# EAGLE board Version 3.0 (EAGLE 7.2.0)
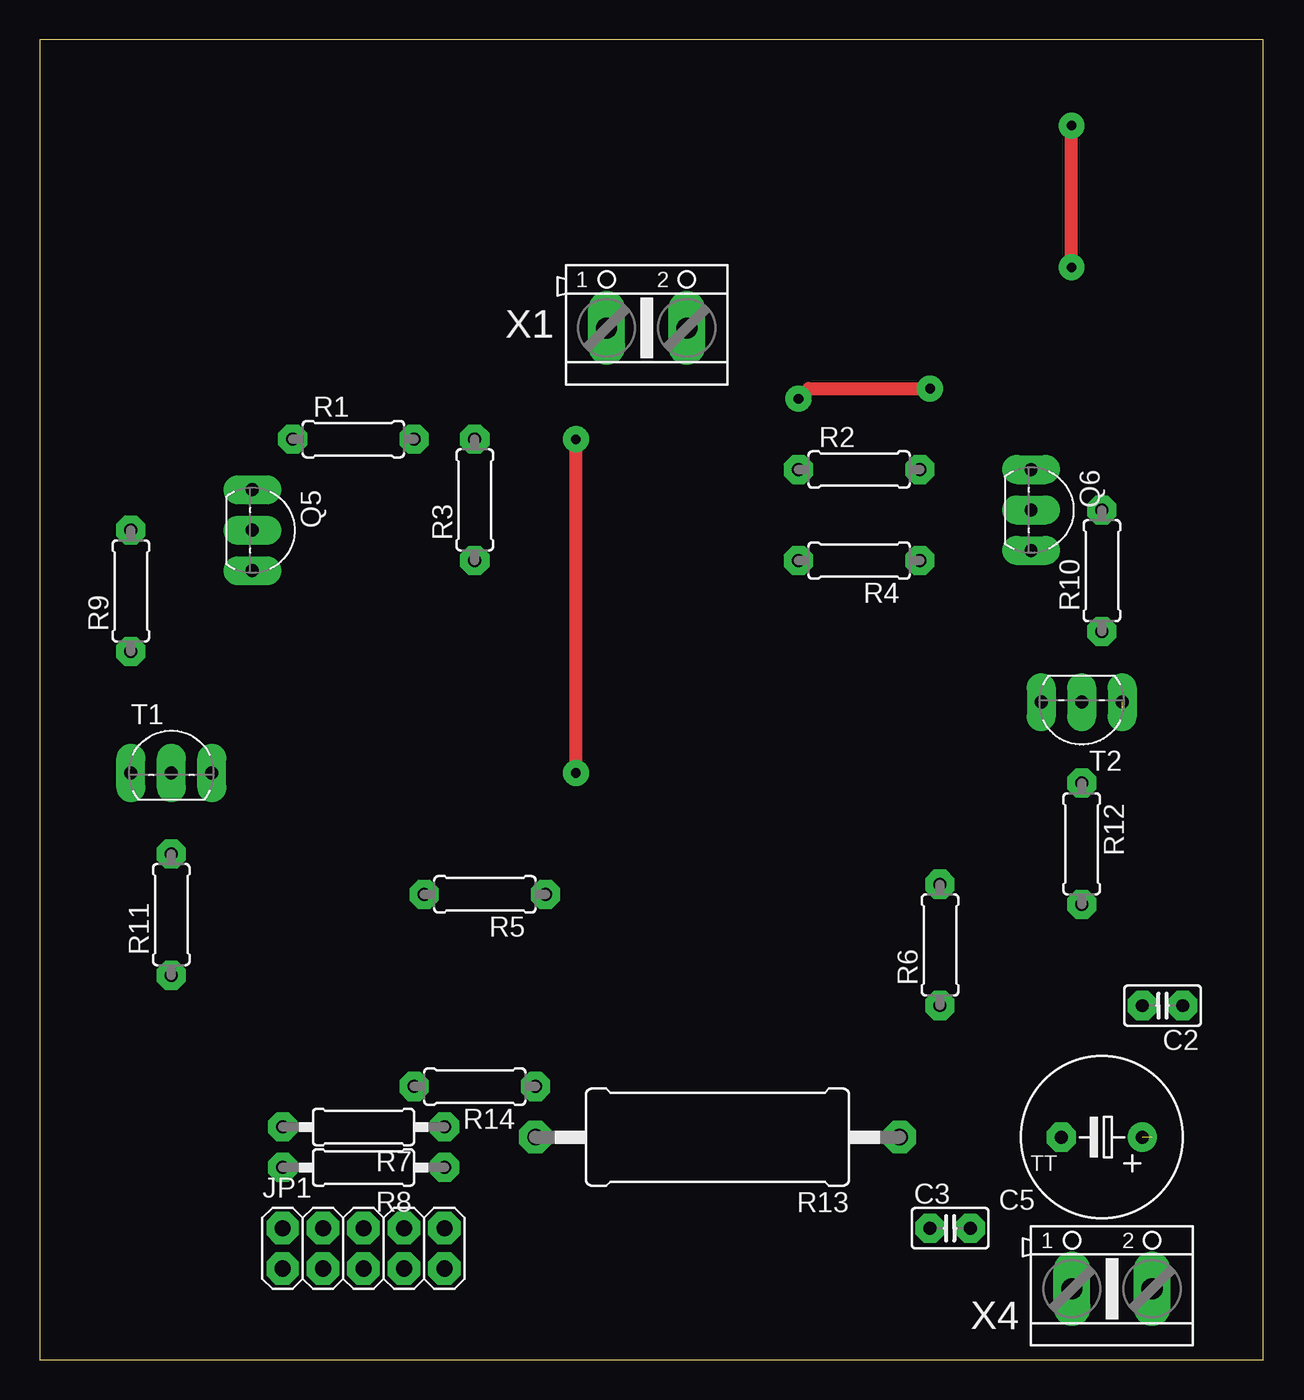
[diagram p0: board, top side]
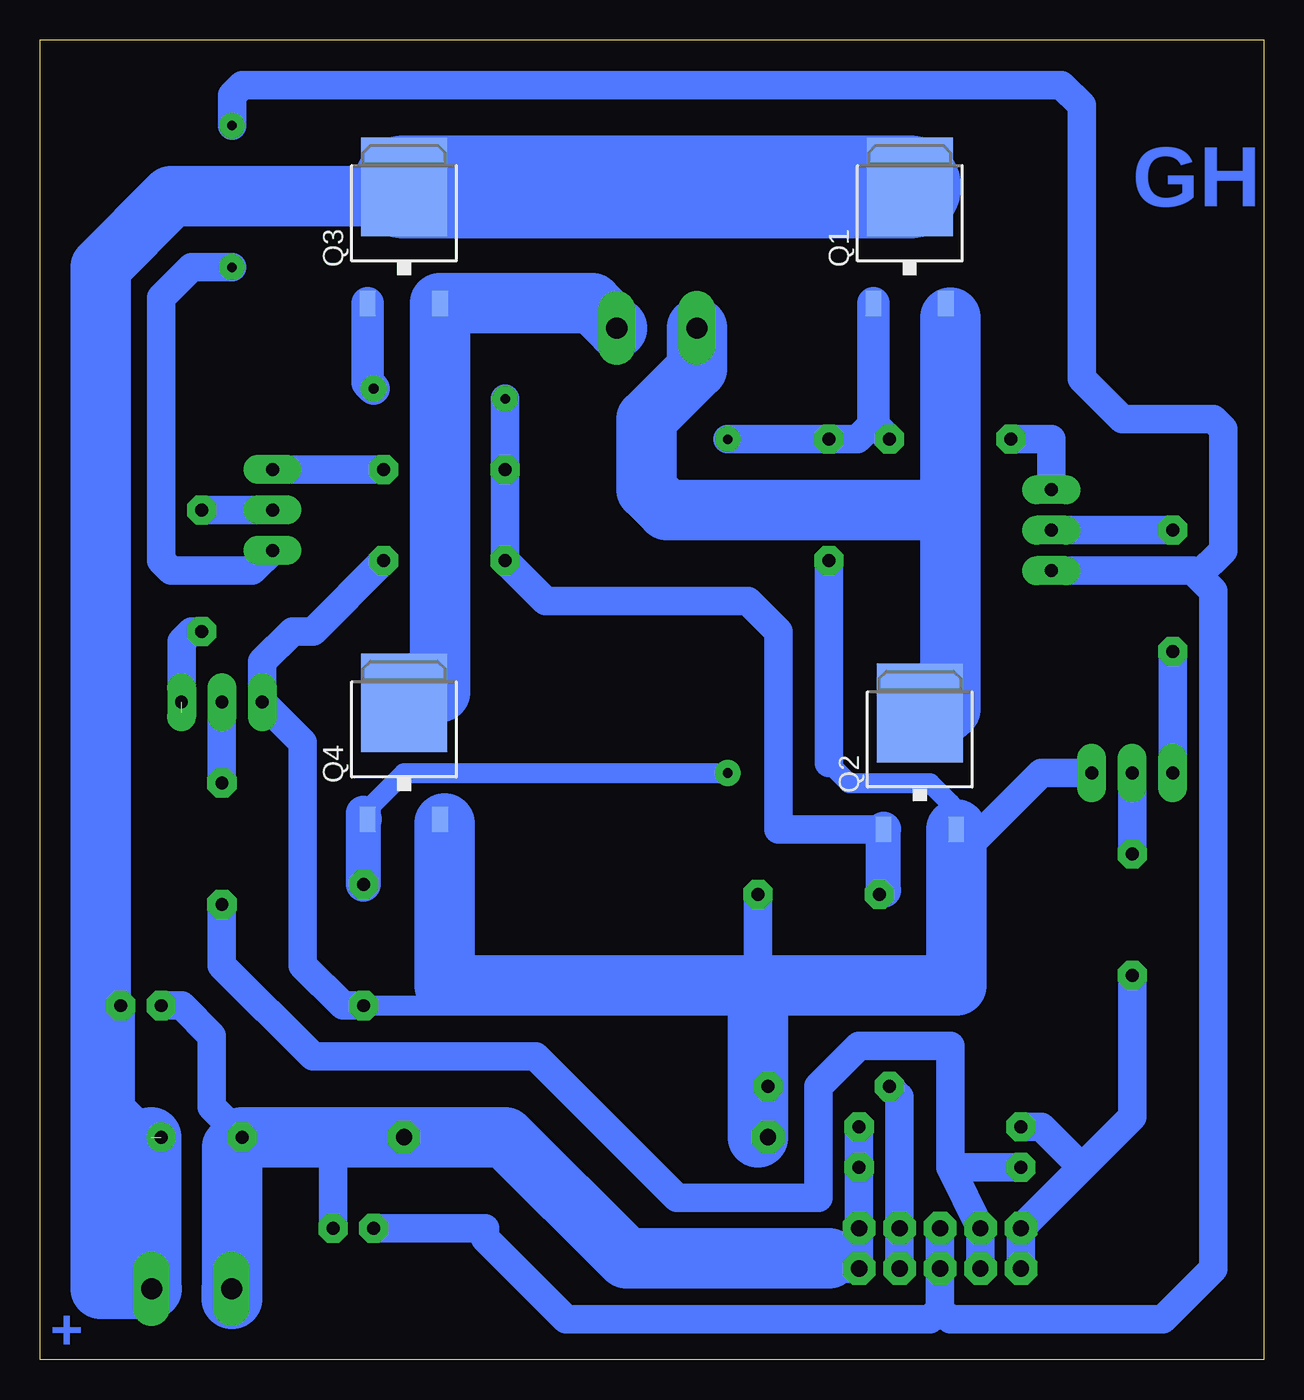
[diagram p1: board, bottom side, seen from below]

Size 76.81 x 82.86 mm. Coordinates in mm from the lower left corner, seen from the top.
Outline: 0,0 76.81,0 76.81,82.86 0,82.86 0,0
Copper layers (1*16): Top 0.035mm / dielectric 1.5mm / Bottom 0.035mm
Design rules "default": minimum track width 40mil, minimum drill 40mil, track to track 8mil, track to pad 8mil, pad to pad 8mil, via to via 8mil, smd to smd 8mil, copper to edge 40mil, drill to drill 8mil, minimum pad ring 20mil, minimum via ring 20mil, stop-mask expansion 4mil, vias tented up to drill 0mil, thermal gap 40mil

## Footprints (pad centres in the part's own frame; a part is rotated, then mirrored left to right if it is on the bottom)
C025-025X050 = drill 0.813 octagon: 1 -1.27,0; 2 1.27,0
TT5D10 = drill 0.813: + -2.54,0 | drill 0.813 octagon: - 2.54,0
2X05 = drill 1.016 octagon: 1 -5.08,-1.27; 2 -5.08,1.27; 3 -2.54,-1.27; 4 -2.54,1.27; 5 0,-1.27; 6 0,1.27; 7 2.54,-1.27; 8 2.54,1.27; 9 5.08,-1.27; 10 5.08,1.27
TO252 = smd 1 x 1.6: 1 -2.28,-4.8; 2 2.28,-4.8 | smd 5.4 x 6.2: 3 0,2.5
TO92-EBC = drill 0.813 long: B 0,-1.27; C -2.54,-1.27; E 2.54,-1.27
0207/7 = drill 0.813 octagon: 1 -3.81,0; 2 3.81,0
0207/10 = drill 0.813 octagon: 1 -5.08,0; 2 5.08,0
0617/22 = drill 1.016 octagon: 1 -11.43,0; 2 11.43,0
TO92-CBE = drill 0.813 long: B 0,0; C -2.54,0; E 2.54,0
AK500/2 = drill 1.321 long: 1 -2.515,0; 2 2.515,0

## Placement (x,y rotation side)
C2  100nf  [C025-025X050]  70.48,22.23 180 top
C3  100nf  [C025-025X050]  57.15,8.26 0 top
C5  1000 uf  [TT5D10]  66.67,13.97 180 top
JP1  [2X05]  20.32,6.99 0 top
Q1  PO903BDGTO252  [TO252]  22.23,71.12 0 bottom
Q2  PO903BDGTO252  [TO252]  21.59,38.1 0 bottom
Q3  PO903BDGTO252  [TO252]  53.98,71.12 0 bottom
Q4  PO903BDGTO252  [TO252]  53.98,38.73 0 bottom
Q5  BC557  [TO92-EBC]  14.61,52.07 270 top
Q6  BC557  [TO92-EBC]  63.5,53.34 270 top
R1  100R  [0207/7]  19.68,57.78 0 top
R2  100R  [0207/7]  51.44,55.88 0 top
R3  10k  [0207/7]  27.3,53.98 90 top
R4  10k  [0207/7]  51.44,50.16 180 top
R5  10k  [0207/7]  27.94,29.21 180 top
R6  10k  [0207/7]  56.52,26.04 90 top
R7  10k  [0207/10]  20.32,14.61 180 top
R8  10k  [0207/10]  20.32,12.06 180 top
R9  10k  [0207/7]  5.71,48.26 90 top
R10  10k  [0207/7]  66.67,49.53 90 top
R11  1k  [0207/7]  8.26,27.94 90 top
R12  1k  [0207/7]  65.41,32.38 270 top
R13  0.33  [0617/22]  42.55,13.97 180 top
R14  4K7  [0207/7]  27.3,17.14 180 top
T1  BC547  [TO92-CBE]  8.26,36.83 0 top
T2  BC547  [TO92-CBE]  65.41,41.27 180 top
X1  [AK500/2]  38.1,64.77 0 top
X4  [AK500/2]  67.31,4.45 0 top

## Library data of the parts
C2 C3 C5 R1-R14 = rcl
JP1 = pinhead
Q1-Q4 = transistor-fet
Q5 Q6 = transistor-pnp
T1 T2 = transistor
X1 X4 = con-ptr500; OC_FARNELL: unknown; OC_NEWARK: unknown

## Nets
+12V: C2.1 C5.+ Q1.3 Q3.3 X4.2
+18V: C3.1 JP1.5 JP1.6 Q5.E Q6.E
A: JP1.1 JP1.2 R7.2 R11.1
B: JP1.3 JP1.4 R8.2 R12.2
GND: C2.2 C3.2 C5.- JP1.9 JP1.10 R7.1 R8.1 R13.1 X4.1
N$1: Q1.1 Q4.1 R1.2 R3.2 R6.2
N$2: Q2.1 Q3.1 R2.1 R4.2 R5.2
N$4: Q1.2 Q2.3 X1.1
N$6: Q3.2 Q4.3 X1.2
N$7: Q6.C R2.2
N$8: Q5.C R1.1
N$9: Q5.B R9.2
N$10: R9.1 T1.C
N$11: Q6.B R10.2
N$12: Q2.2 Q4.2 R3.1 R4.1 R5.1 R6.1 R13.2 R14.1 T1.E T2.E
N$13: R10.1 T2.C
N$14: R11.2 T1.B
N$15: R12.1 T2.B
SENSEA: JP1.7 JP1.8 R14.2

## Tracks (layer width: path | path; a pad name or v marks a point on that pad's centre or on a via)
+12V  (1 unrouted)
  Bottom 1.778: 69.85,13.97 71.75,15.88 C2.1
  Bottom 3.81: 69.85,13.97 69.85,4.47 X4.2 73.03,4.45 73.03,68.58 68.58,73.03 53.98,73.03 Q3.3
  Bottom 6.452: Q1.3 Q3.3
+18V  (via drill 0.6)
  Top 0.813: v64.77,68.58 v64.77,77.47
  Bottom 1.778: C3.1 48.9,8.26 48.9,7.62 43.81,2.54 20.95,2.54 20.32,3.17 | Q5.E 4.45,49.53 4.13,49.21 | 4.13,49.21 3.17,48.26 3.17,5.71 6.35,2.54 19.68,2.54 20.32,3.17 | 20.32,3.17 JP1.5 JP1.6 | Q6.E 63.5,49.53 68.58,49.53 69.22,50.16 69.22,66.67 67.31,68.58 v64.77,68.58 | v64.77,77.47 64.77,79.38 64.14,80.01 12.7,80.01 11.43,78.74 11.43,61.59 8.89,59.05 3.17,59.05 2.54,58.42 2.54,50.8 4.13,49.21
A
  Bottom 1.778: JP1.1 JP1.2 11.43,12.06 | 11.43,12.06 8.26,15.24 R11.1 | R7.2 13.97,14.61 11.43,12.06
B
  Bottom 1.778: R12.2 65.41,24.77 59.69,19.05 45.72,19.05 36.83,10.16 27.94,10.16 27.94,17.14 25.4,19.68 19.68,19.68 19.68,12.06 | JP1.3 JP1.4 19.68,12.06 | 19.68,12.06 R8.2
GND
  Bottom 1.778: C5.- 66.04,15.88 66.04,20.32 67.94,22.23 C2.2 | C3.2 58.42,13.34 59.05,13.97 | 27.3,6.35 26.67,5.71 JP1.9 JP1.10 R8.1 R7.1
  Bottom 3.81: X4.1 64.8,3.83 64.77,3.81 64.77,13.34 C5.- 59.05,13.97 R13.1 47.62,13.97 40.01,6.35 27.3,6.35
N$1  (via drill 0.6)
  Top 0.813: v33.66,36.83 v33.66,57.78
  Bottom 1.27: 56.52,34.29 53.98,36.83 v33.66,36.83 | 56.52,33.66 56.26,33.91
  Bottom 1.778: 56.52,34.29 56.52,34.2 Q4.1 56.26,33.91 | R1.2 24.5,58.8 25.52,57.78 R3.2 v33.66,57.78
  Bottom 2.032: Q1.1 24.5,58.8
  Bottom 2.184: R6.2 56.52,34.29
N$2  (via drill 0.6)
  Top 0.813: v47.62,60.33 48.26,60.96 v55.88,60.96
  Bottom 1.778: R5.2 23.87,29.47 | Q2.1 30.48,33.3 30.48,45.72 32.38,47.62 45.09,47.62 R4.2 R2.1 v47.62,60.33
  Bottom 2.032: Q3.1 56.26,61.34 v55.88,60.96
  Bottom 2.184: 23.87,29.47 Q2.1
N$4
  Bottom 1.778: 19.68,65.41 19.95,65.67 Q1.2
  Bottom 3.81: Q2.3 19.95,40.6 19.68,40.86 19.68,53.34 | 19.68,53.34 19.68,65.41 | 19.68,53.34 37.47,53.34 38.73,54.61 38.73,59.05 35.59,62.2 X1.1
N$6
  Bottom 1.778: 53.34,41.91 53.34,41.87 Q4.3
  Bottom 3.81: 53.34,41.91 51.7,41.91 Q3.2 42.16,66.32 X1.2
N$7
  Bottom 1.778: R2.2 Q6.C
N$8
  Bottom 1.778: R1.1 13.34,57.78 Q5.C
N$9
  Bottom 1.778: Q5.B R9.2
N$10
  Bottom 1.778: R9.1 T1.C
N$11
  Bottom 1.778: R10.2 Q6.B 61.59,53.34
N$12
  Bottom 1.27: 27.3,37.47 26.04,36.2 20.95,36.2 19.68,34.92 19.68,33.67 Q2.2 | R6.1 51.44,22.23 50.8,22.86 50.8,23.5
  Bottom 1.778: R5.1 31.75,23.5 | R6.1 57.78,22.23 60.33,24.77 60.33,38.73 T2.E 62.87,43.81 60.96,45.72 59.69,45.72 R4.1 | 19.31,31.75 18.68,32.38 18.41,32.38 13.97,36.83 T1.E | R14.1 R13.2 | Q4.2 51.7,33.28 51.44,33.02 | R3.1 27.3,37.47
  Bottom 2.54: 31.75,13.97 R13.2
  Bottom 3.81: Q2.2 19.31,31.75 19.31,23.5 31.75,23.5 | 31.75,23.5 50.8,23.5 51.44,23.5 51.44,33.02 51.44,33.66 | 31.75,23.5 31.75,13.97
N$13  (1 unrouted)
  Bottom 1.778: R10.1 67.31,45.72 67.94,45.09 67.94,40.64
N$14
  Bottom 1.778: T1.B R11.2
N$15
  Bottom 1.778: T2.B R12.1
SENSEA
  Bottom 1.778: R14.2 22.86,16.51 JP1.8 JP1.7

## Text on the board
Bottom: GH | +